# EAGLE board 1278-Micro-v2 (EAGLE 9.6.2)
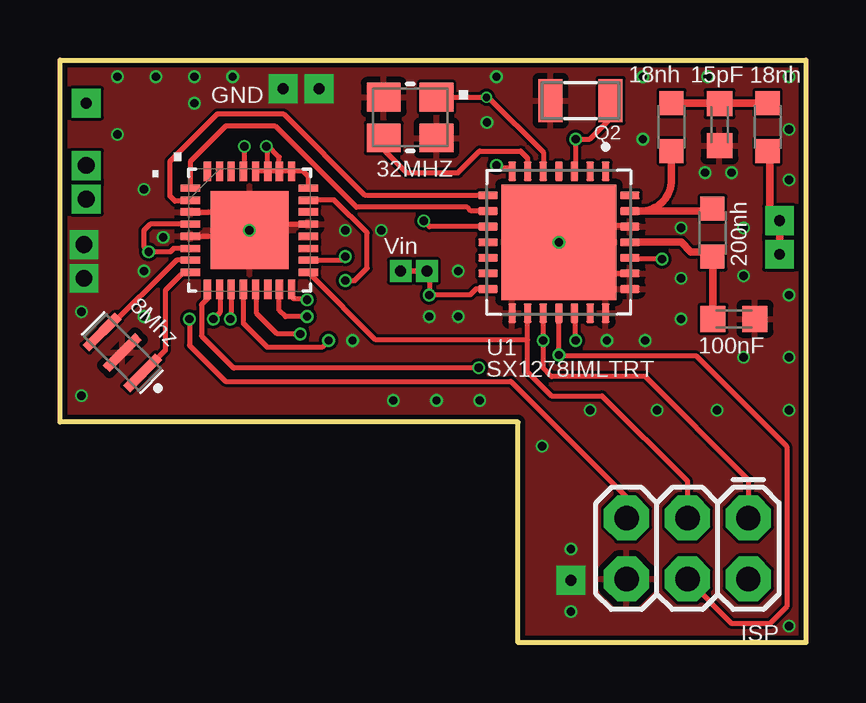
[diagram p0: board, top side]
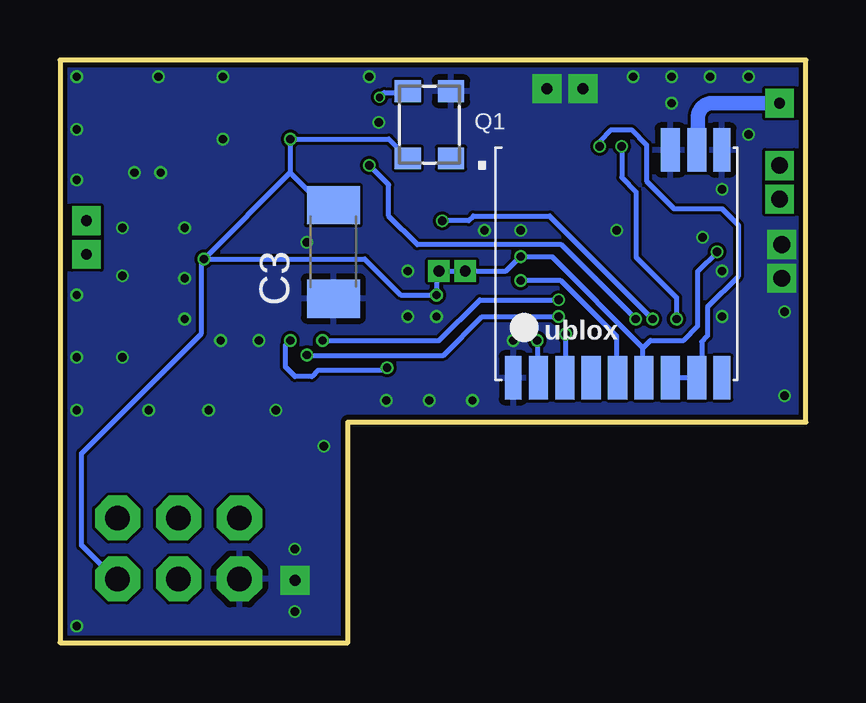
[diagram p1: board, bottom side, seen from below]

Size 31.1 x 24.3 mm. Coordinates in mm from the lower left corner, seen from the top.
Outline: 0,24.3 31.1,24.3 31.1,0 19.1,0 19.1,9.2 0,9.2 0,24.3
Copper layers (1*16): Top 0.035559375mm / dielectric 1.6mm / Bottom 0.035559375mm
Design rules "jlcpcb2layer *": minimum track width 5mil, minimum drill 12mil, track to track 5mil, track to pad 5mil, pad to pad 5mil, via to via 5mil, smd to smd 5mil, copper to edge 8mil, drill to drill 6mil, minimum pad ring 5mil, minimum via ring 3mil, stop-mask expansion 2.5mil, vias tented up to drill 14mil, thermal gap 10mil
Net classes: 0 default: width 0.203 mm; 1 vcc: width 0.152 mm, clearance 0.152 mm

## Footprints (pad centres in the part's own frame; a part is rotated, then mirrored left to right if it is on the bottom)
ABM8G = smd 1.4 x 1.2: 1 -1.1,-0.85; 2 1.1,-0.85; 3 1.1,0.85; 4 -1.1,0.85
C0603K = smd 1.05 x 1.08: 1 -0.875,0; 2 0.875,0
C1808 = smd 1.6 x 2.2: 1 -1.95,0; 2 1.95,0
2X3 = drill 1.016 pad 1.88 octagon: 1 0,0; 2 0,2.54; 3 2.54,0; 4 2.54,2.54; 5 5.08,0; 6 5.08,2.54
L2012C = smd 1 x 1: 1 -1,0; 2 1,0
3.2X2.5_KXO-84-TCXO = smd 0.9 x 1.1: 1 -1.4,-0.9; 2 1.4,-0.9; 3 1.4,0.9; 4 -1.4,0.9
3.2X1.5 = smd 1 x 1.8: 1 -1.25,0; 2 1.25,0
QFN65P600X600X100-29N = smd 4.8 x 4.8: 0 0,0 | smd 0.81 x 0.32: 1 -2.955,1.95; 2 -2.955,1.3; 3 -2.955,0.65; 4 -2.955,0; 5 -2.955,-0.65; 6 -2.955,-1.3; 7 -2.955,-1.95; 15 2.955,-1.95; 16 2.955,-1.3; 17 2.955,-0.65; 18 2.955,0; 19 2.955,0.65; 20 2.955,1.3; 21 2.955,1.95 | smd 0.32 x 0.81: 8 -1.95,-2.955; 9 -1.3,-2.955; 10 -0.65,-2.955; 11 0,-2.955; 12 0.65,-2.955; 13 1.3,-2.955; 14 1.95,-2.955; 22 1.95,2.955; 23 1.3,2.955; 24 0.65,2.955; 25 0,2.955; 26 -0.65,2.955; 27 -1.3,2.955; 28 -1.95,2.955
QFN50P500X500X100-33N = smd 0.813 x 0.305: 1 -2.464,1.753; 2 -2.464,1.245; 3 -2.464,0.762; 4 -2.464,0.254; 5 -2.464,-0.254; 6 -2.464,-0.762; 7 -2.464,-1.245; 8 -2.464,-1.753; 17 2.464,-1.753; 18 2.464,-1.245; 19 2.464,-0.762; 20 2.464,-0.254; 21 2.464,0.254; 22 2.464,0.762; 23 2.464,1.245; 24 2.464,1.753 | smd 0.305 x 0.813: 9 -1.753,-2.464; 10 -1.245,-2.464; 11 -0.762,-2.464; 12 -0.254,-2.464; 13 0.254,-2.464; 14 0.762,-2.464; 15 1.245,-2.464; 16 1.753,-2.464; 25 1.753,2.464; 26 1.245,2.464; 27 0.762,2.464; 28 0.254,2.464; 29 -0.254,2.464; 30 -0.762,2.464; 31 -1.245,2.464; 32 -1.753,2.464 | smd 3.251 x 3.251: 33 0,0
UBLOX_MAX = smd 1.8 x 0.7: 1_GND 4.95,-4.4; 9_V_RESET 4.95,4.3; 10_GND -4.55,4.3 | smd 1.8 x 0.8: 2_TXD1 4.95,-3.35; 3_RXD1 4.95,-2.25; 4_TIMEPULSE 4.95,-1.15; 5_EXTINT0 4.95,-0.05; 6_V_BCKP 4.95,1.05; 7_VCC_IO 4.95,2.15; 8_VCC 4.95,3.25; 11_RF_IN -4.55,3.25; 12_GND -4.55,2.15
OSC_CSTCE12M0G15L08-R0 = smd 0.4 x 1.9: 1 -1.2,0; 2 0,0; 3 1.2,0

## Placement (x,y rotation side)
32MHZ  16Mhz  [ABM8G]  14.6,21.9 180 top
C1  100nF  [C0603K]  28.1,13.5 0 top
C2  15pF  [C0603K]  27.5,21.6 90 top
C3  [C1808]  19.7,16.3 90 bottom
ISP  [2X3]  28.7,5.2 180 top
L1  18nh  [L2012C]  29.5,21.5 90 top
L2  18nh  [L2012C]  25.5,21.5 270 top
L3  200nh  [L2012C]  27.2,17.1 90 top
Q1  TCXO 32Mhz  [3.2X2.5_KXO-84-TCXO]  15.7,21.6 90 bottom
Q2  [3.2X1.5]  21.7,22.6 180 top
U1  SX1278IMLTRT  [QFN65P600X600X100-29N]  20.8,16.7 270 top
U4  ATMEGA328P-MU  [QFN50P500X500X100-33N]  7.9,17.2 0 top
U$2  UBLOX_MAX  [UBLOX_MAX]  7.8,16 270 bottom
Y1  8Mhz  [OSC_CSTCE12M0G15L08-R0]  2.6,12.1 135 top

## Library data of the parts
32MHZ = crystal
C1 C2 = rcl; SPICEPREFIX: C
C3 L1-L3 = resistor
ISP = SparkFun
Q1 Q2 = crystal-geyer_V1_0
U1 = SX1278IMLTRT; DESCRIPTION: IC RF TxRx Only 802.15.4 LoRa™ 137MHz ~ 525MHz 28-VQFN Exposed Pad; DIGI-KEY_PART_NUMBER: SX1278IMLTRTCT-ND; MF: Semtech; MP: SX1278IMLTRT; PACKAGE: VQFN-28 Semtech
U4 = ava; MPN: ATMEGA328P-MU; OC_FARNELL: 1748522; OC_NEWARK: 26R2526; PACKAGE: QFN-32; SUPPLIER: Atmel
U$2 = Max gps
Y1 = CSTCE12M0G15L08-R0; AVAILABILITY: Not in stock; DESCRIPTION: CSTCE Series 12 MHz 3.2 x 1.3 x 0.7 mm Built-in Capacitor SMT Resonator; MF: Murata; MP: CSTCE12M0G15L08-R0; PACKAGE: SMD-3 Murata; PRICE: None

## Nets
9_V_RESET: U$2.9_V_RESET
AAA: 32MHZ.1 Q1.3 U1.5
APRS-ANT: L1.1
GND: 32MHZ.2 32MHZ.4 C1.2 C2.1 C3.1 ISP.6 Q1.2 Q2.2 U1.0 U1.15 U1.21 U1.22 U1.23 U1.26 U4.3 U4.5 U4.21 U4.33 U$2.1_GND U$2.10_GND U$2.12_GND Y1.2
GND/NC: Q1.1
GPS-ON: U4.24 U4.25 U4.26 U4.27 U4.28 U$2.7_VCC_IO U$2.8_VCC
GPS_ANT: U$2.11_RF_IN
GPS_ON/OFF: U4.23 U$2.5_EXTINT0
GPS_RX: U4.13 U$2.3_RXD1
GPS_TX: U4.12 U$2.2_TXD1
N$1: U4.7 Y1.3
N$2: U4.8 Y1.1
N$3: C2.2 L1.2 L2.1
N$8: C1.1 L3.1 U1.25
N$9: L2.2 L3.2 U1.27
N$15: 32MHZ.3 U1.6
PB3_MOSI: ISP.4 U1.18 U4.15
PB4_MISO: ISP.1 U1.17 U4.16
PB5_SCK: ISP.3 U1.16 U4.17
PC6_RESET: ISP.5 U4.29
PD3: U1.9 U4.1
PD4: U1.8 U4.2
PD5: U1.19 U4.9
PD6: U1.10 U4.10
PD7: U1.7 U4.11
RX: U4.30
TX: U4.31
VIN: C3.2 ISP.2 Q1.4 Q2.1 U1.3 U1.14 U1.24 U4.4 U4.6 U4.18 U$2.6_V_BCKP
VR_ANA: U1.2
VR_DIG: U1.4

## Tracks (layer width: path | path; a pad name or v marks a point on that pad's centre or on a via)
AAA  (via drill 0.3)
  Top 0.203: 32MHZ.1 v17.78,22.75 | v17.78,22.75 17.85,22.75 20.15,20.45 U1.5 | v17.78,22.74 v17.78,22.75
  Bottom 0.203: v17.78,22.74 17.58,22.94 16.66,22.94 Q1.3
APRS-ANT  (via drill 0.45 pad 1.2)
  Top 0.305: v30,16.2 v30,17.6 arc-90 29.6,18 29.6,20.4 L1.1
GND  (via drill 0.35, 0.45 pad 1.2, 0.7 pad 1.2)
  Top 0.203: U4.5 6.75,16.95 6.8,16.9 7.1,16.9 | 7.1,16.9 7.89,16.9 | 7.89,16.9 8.6,16.9 9.15,17.45 U4.21 | U4.3 6.74,17.96 7.1,17.6 7.1,16.9 | 7.89,16.9 7.89,17.14 U4.33 | 22.2,17.29 21.3,17.29 20.84,16.84 U1.0 | U1.26 23.71,17.39 22.2,17.39 22.2,17.29 | U1.23 22.6,15.4 22.2,15.8 22.2,17.29
  other vias: 15.4,13.6 21.3,1.3 4.3,16.9 13.9,10.1 1,16.6 1,15.2 2.4,21.2 2.4,23.6 7.2,23.6 15.7,10.1 17.5,10.1 21.3,3.9 30.4,0.7 3.5,18.9 17.8,21.7 18.2,23.6 27,23.6 30.4,23.6 24.4,12.6 22.8,12.6 30.4,19.3 30.4,21.4 28,19.6 26.9,19.6 24.3,21 25.9,17.3 25.9,13.5 28.5,17.3 28.5,15.3 30.4,14.5 30.4,11.9 28.5,11.9 25.9,15.2 12.2,12.6 22.1,9.7 24.9,9.7 27.4,9.7 20.1,8.2 16.6,13.6 5.6,23.6 4,23.6 5.6,22.5 20.8,16.7 11.9,17.2 13.4,17.2 30.4,9.7 10.8,23.1 9.3,23.1 16.6,15.5 0.9,10.3 24.3,23.6 7.9,17.2 21.3,2.6 0.9,13.8 3.5,13.6 3.5,15.5
  pour Top: -12.19,36.02 41.75,36.02 41.75,-7.09 -12.19,-7.09
  pour Bottom: -12.19,36.02 41.75,36.02 41.75,-7.09 -12.19,-7.09
GPS-ON  (via drill 0.35)
  Top 0.203: U4.24 10.36,19.44 10.14,19.66 U4.25 U4.26 | U4.26 U4.27 | U4.27 U4.28 | U4.27 8.66,20.64 | 8.66,20.64 8.66,20.74 9.14,20.25 U4.26 | 8.66,20.64 v8.6,20.7
  Bottom 0.203: v8.6,20.7 8.6,20.9 8.11,21.39 7.28,21.39 6.65,20.76 6.65,19.25 5.5,18.1 3.5,18.1 2.8,17.4 2.8,15.3 4.11,13.99 4.11,12.79 4.35,12.55 4.35,11.25 U$2.8_VCC U$2.7_VCC_IO
GPS_ANT  (via drill 0.45 pad 1.2)
  Bottom 0.203: 4.5,20.6 arc90 U$2.11_RF_IN
  Bottom 0.61: v1.1,22.5 3.9,22.5 arc-90 4.5,21.9 4.5,20.6
GPS_ON/OFF  (via drill 0.35)
  Top 0.203: U4.23 10.38,18.46 11.44,18.46 12.8,17.09 12.8,15.62 12.29,15.1 v11.9,15.1
  Bottom 0.203: v11.9,15.1 10.21,15.1 7.89,12.77 7.89,11.2 U$2.5_EXTINT0
GPS_RX  (via drill 0.35)
  Top 0.203: v10.02,12.87 9.06,12.87 8.2,13.73 8.2,14.7 U4.13
  Bottom 0.203: U$2.3_RXD1 10.02,11.08 v10.02,12.87
GPS_TX  (via drill 0.35)
  Top 0.203: U4.12 7.64,14.73 7.64,13.34 8.66,12.32 10.92,12.32 v11.2,12.6
  Bottom 0.203: v11.2,12.6 v11.19,12.59 11.19,11.09 U$2.2_TXD1
N$1
  Top 0.203: U4.7 4.86,15.96 1.85,12.95 Y1.3
N$2
  Top 0.203: Y1.1 4.4,12.2 4.4,14.7 5.15,15.45 U4.8
N$3
  Top 0.203: 27.15,22.5 27.18,22.48 C2.2 27.53,22.5
  Top 0.305: L2.1 27.15,22.5 | L1.2 27.53,22.5
N$8
  Top 0.203: L3.1 27.22,16.07
  Top 0.305: U1.25 25.9,16.7 26.3,16.3 27,16.3 L3.1 | 27.22,16.07 C1.1
N$9
  Top 0.203: L3.2 27.25,18.1 27.35,18
  Top 0.305: 27.35,18 24.2,18 | 24.2,18 U1.27 | L2.2 25.5,19.3 arc-90 24.2,18
N$10  (via drill 0.7 pad 1.2)
  other vias: 1.1,19.9
N$11  (via drill 0.7 pad 1.2)
  other vias: 1.1,18.5
N$15
  Top 0.203: 32MHZ.3 13.5,20.55 14.45,19.6 16.6,19.6 17.5,20.5 19.2,20.5 19.5,20.2 U1.6
PB3_MOSI  (via drill 0.35)
  Top 0.203: U1.18 v20.8,12 20.84,11.96 26.53,11.96 30.3,8.19 30.3,1.5 29.6,0.8 28.02,0.8 ISP.4 | v10.3,13.6 9.4,13.6 9.14,13.86 U4.15
  Bottom 0.203: v20.8,12 20.78,11.98 15.12,11.98 13.5,13.6 v10.3,13.6
PB4_MISO  (via drill 0.35)
  Top 0.203: U1.17 v20.15,12.6 20.15,11.45 20.5,11.1 24.4,11.1 28.7,6.8 ISP.1 | v10.3,14.3 10.26,14.34 9.75,14.34 9.65,14.44 U4.16
  Bottom 0.203: v20.15,12.6 15.3,12.6 13.6,14.3 v10.3,14.3
PB5_SCK
  Top 0.203: 19.5,12.63 19.5,11.3 20.5,10.3 22.6,10.3 26.16,6.74 ISP.3 | 19.5,12.63 U1.16 | 19.5,12.63 13.17,12.63 10.48,15.31 U4.17
PC6_RESET  (via drill 0.35)
  Top 0.203: U4.29 7.68,19.7 v7.68,20.69 | v5.4,13.5 5.4,12.4 6.9,10.9 18.8,10.9 23.62,6.08 ISP.5
  Bottom 0.203: v7.68,20.69 7.68,19.39 7.08,18.79 7.08,16.08 5.4,14.4 v5.4,13.5
PD3
  Top 0.203: U1.9 17.14,18 16.99,18.16 12.36,18.16 8.96,21.55 6.92,21.55 5.45,20.08 5.45,18.97 U4.1
PD4
  Top 0.203: U4.2 5.4,18.41 4.79,18.41 4.59,18.62 4.59,20.08 6.56,22.06 9.31,22.06 12.7,18.66 17.79,18.66 U1.8
PD5  (via drill 0.35)
  Top 0.203: 21.45,13.48 21.45,13.64 U1.19 21.5,13.7 v21.5,12.6 | U4.9 6.15,14.35 5.9,14.1 5.9,12.8 7.24,11.46 17.45,11.46 v17.46,11.47
  Bottom 0.203: v17.46,11.47 17.56,11.37 20.33,11.37 20.6,11.1 21.3,11.1 21.7,11.5 21.7,12.4 v21.5,12.6
PD6  (via drill 0.35)
  Top 0.203: U1.10 15.4,17.35 v15.16,17.59 | U4.10 6.67,14.72 6.67,13.77 v6.4,13.5
  Bottom 0.203: v15.16,17.59 14.06,17.59 13.86,17.79 10.69,17.79 v6.4,13.5
PD7  (via drill 0.35)
  Top 0.203: 7.13,14.65 7.14,14.66 U4.11 7.14,13.54 v7.1,13.5 | 18.81,19.73 18.8,19.71 U1.7 18.89,19.7 18.79,19.8 18.3,19.8 v18.2,19.9
  Bottom 0.203: v18.2,19.9 17.4,19.1 17.4,17.8 16.2,16.6 10.2,16.6 v7.1,13.5
VIN  (via drill 0.35, 0.45 pad 0.9)
  Top 0.203: U1.3 21.5,19.71 v21.5,21 22.1,21 22.95,21.85 Q2.1 | U1.14 17.35,14.75 17.1,14.5 v15.4,14.5 15.4,15.4 v15.3,15.5 v14.2,15.5 14.9,15.5 | v25.1,16 23.8,16 U1.24 | U4.18 11.75,15.96 v11.9,16.1 | 5.4,16.4 U4.6 4.74,16.44 4.6,16.3 v3.7,16.3 3.5,16.5 3.5,17.2 3.75,17.45 U4.4
  Bottom 0.203: v25.1,16 18.4,16 16.9,14.5 v15.4,14.5 15.4,15.4 v15.3,15.5 12.5,15.5 v11.9,16.1 10.6,16.1 6.8,12.3 | 21.5,19.6 v21.5,21 17.4,21 Q1.4 | 21.5,19.6 v25.1,16 | v25.1,16 25.2,15.9 25.2,12.9 30.2,7.9 30.2,4.06 28.8,2.66 ISP.2 | U$2.6_V_BCKP 6.8,11.1 6.8,12.3 | 21.5,19.6 20.15,18.25 C3.2 | v3.7,16.3 4.51,15.49 4.51,13.2 5.1,12.61 6.48,12.61 6.8,12.3

## Text on the board
tPlace: .
tNames: GND | Vin
bNames: .